# Altium PCB SZG-TEMPLATE-STD.PcbDoc (part 2 of 2)
Units mil, origin at the board's own origin, x right, y up, seen from the top; angles counter-clockwise.
Board outline 1771.65 x 2755.91 mil, 4 copper layers (L1-TOP, L2-GND, L3-3.3V, L4-BOT), stack 60.25 mil thick; 64 components, 79 nets, 292 pads, 121 vias.
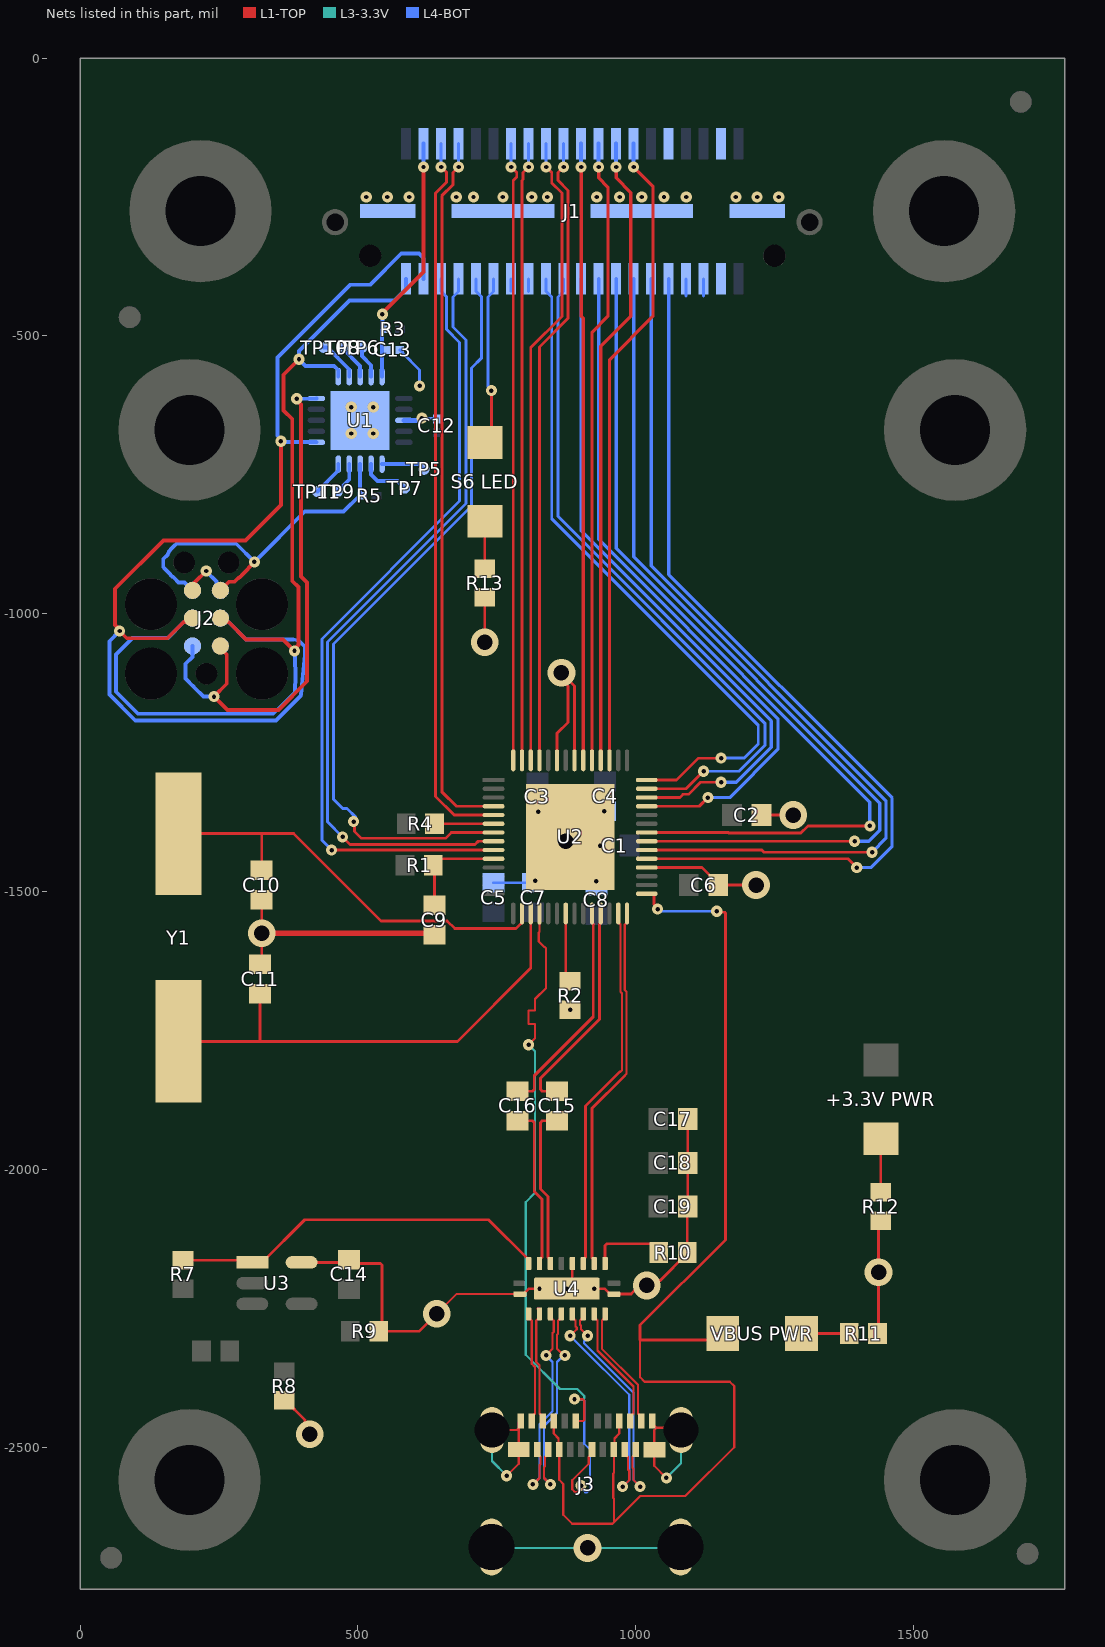
[diagram p4: the nets of this part, all layers, seen from the top]

## Via types
v1: diameter 20, hole 8, L1-TOP to L4-BOT, tented both sides, 57 vias
v2: diameter 20, hole 8, L1-TOP to L4-BOT, 47 vias
v3: diameter 50, hole 28, L1-TOP to L4-BOT, 14 vias
v4: diameter 19.68, hole 7.87, L1-TOP to L4-BOT, 3 vias

## Nets (pads, with @x,y where several pads share a name; then routed paths per layer and width w, separated by ;. In a path a pad name is that pad's centre, name@x,y a point inside that pad or via, vN(x,y) a via of type N, cw(c..) or ccw(c..) an arc to the next point about the centre after c; other vN are vias at no path point) (continued)
DA_P: J3.A6 J3.B6 U2.18 | length 1397.7
  L1-TOP w4: v2(807.09,-1775.59) 818.83,-1763.84 818.83,-1740.16 818.83,-1738.16 806.83,-1738.16 806.83,-1714.16 818.83,-1714.16 818.83,-1700.79 818.83,-1693.48 838.52,-1673.79 838.52,-1602.02 836.18,-1599.68 835.48,-1599.68 825.52,-1589.72 825.52,-1573.57 826.77,-1572.32 U2.18@826.77,-1539.37 ; v2(889.76,-2413.39) 905.07,-2413.39 907.42,-2415.73 907.42,-2429.07 ; J3.A6@891.73,-2452.76 905.07,-2452.76 907.42,-2450.41 907.42,-2429.07 ; v2(901.57,-2569.09) 901.57,-2573.28 894.01,-2580.84 890.7,-2580.84 885.57,-2575.72 885.57,-2559.42 915.42,-2529.58 915.42,-2517.65 921.26,-2511.81 J3.B6@921.26,-2503.94
  L3-3.3V w4: v2(807.09,-1775.59) 818.83,-1787.34 818.83,-2042.02 801.93,-2058.92 801.93,-2333.35 863.66,-2395.08 894.77,-2395.08 907.42,-2407.73 907.42,-2411.04 905.07,-2413.39 v2(889.76,-2413.39)
  L4-BOT w4: v2(889.76,-2413.39) 905.07,-2413.39 907.42,-2415.73 907.42,-2493.48 917.57,-2503.63 917.57,-2575.72 912.45,-2580.84 909.14,-2580.84 901.57,-2573.28 v2(901.57,-2569.09)
DATA_0: J1.31 U2.33 | length 1651.8
  L1-TOP w5: U2.33@1019.69,-1440.94 1381.89,-1440.94 v2(1397.64,-1456.69)
  L4-BOT w6: J1.31@1059.13,-397.24 1059.13,-929.4 1461.26,-1331.53 1461.26,-1418.53 1423.09,-1456.69 v2(1397.64,-1456.69)
DATA_1: J1.29 U2.34 | length 1624.5
  L1-TOP w5: U2.34@1019.69,-1425.2 1226.64,-1425.2 1230.58,-1429.13 v2(1425.2,-1429.13)
  L4-BOT w6: J1.29@1027.63,-397.24 1027.63,-913.45 1450.26,-1336.09 1450.26,-1404.07 v2(1425.2,-1429.13)
DATA_2: J1.27 U2.35 | length 1603.6
  L1-TOP w5: U2.35@1019.69,-1409.45 v2(1393.7,-1409.45)
  L4-BOT w6: J1.27@996.13,-397.24 996.13,-897.7 1439.26,-1340.83 1439.26,-1389.35 1419.16,-1409.45 v2(1393.7,-1409.45)
DATA_3: J1.25 U2.36 | length 1581.1
  L1-TOP w5: U2.36@1019.69,-1393.7 1166.34,-1393.7 1167.35,-1394.7 1296.93,-1394.7 1309.74,-1381.89 v2(1421.26,-1381.89)
  L4-BOT w6: J1.25@964.63,-397.24 964.63,-882.14 1421.26,-1338.77 v2(1421.26,-1381.89)
DATA_4: J1.23 U2.39 | length 1259.2
  L1-TOP w5: U2.39@1019.69,-1346.46 1114.17,-1346.46 v2(1129.92,-1330.71)
  L4-BOT w6: J1.23@933.13,-397.24 933.13,-866.2 1255.91,-1188.98 1255.91,-1244.09 1169.29,-1330.71 v2(1129.92,-1330.71)
DATA_5: J1.21 U2.40 | length 1246.7
  L1-TOP w5: U2.40@1019.69,-1330.71 1079.34,-1330.71 1085.09,-1324.96 1094.69,-1324.96 1116.5,-1303.15 v2(1153.54,-1303.15)
  L4-BOT w6: J1.21@901.63,-397.24 901.63,-850.45 1244.09,-1192.91 1244.09,-1240.16 1181.1,-1303.15 v2(1153.54,-1303.15)
DATA_6: J1.19 U2.41 | length 1243
  L1-TOP w5: U2.41@1019.69,-1314.96 1090.55,-1314.96 v2(1122.05,-1283.46)
  L4-BOT w5.25: J1.19@870.13,-397.24 870.13,-419.87 860,-430 860,-824.57 1232.28,-1196.85 1232.28,-1236.94 1185.76,-1283.46 v2(1122.05,-1283.46)
DATA_7: J1.17 U2.42 | length 1222.9
  L1-TOP w5: U2.42@1019.69,-1299.21 1073.44,-1299.21 1112.81,-1259.84 v2(1153.54,-1259.84)
  L4-BOT w5.25: J1.17@838.63,-397.24 838.63,-419.63 848.75,-429.75 848.75,-829.07 1220.47,-1200.79 1220.47,-1234.26 1194.89,-1259.84 v2(1153.54,-1259.84)
DATA_8: J1.28 U2.45 | length 1156.7
  L1-TOP w6: U2.45@952.76,-1263.78 952.76,-542.81 1031,-464.57 1031,-230.87 v1(996.13,-196)
  L4-BOT w7: v1(996.13,-196) J1.28@996.13,-153.94
DATA_9: J1.26 U2.46 | length 1143.1
  L1-TOP w6: U2.46@937.01,-1263.78 937.01,-518.56 991,-464.57 991,-242 964.63,-215.63 v1(964.63,-196)
  L4-BOT w7: v1(964.63,-196) J1.26@964.63,-153.94
DATA_10: J1.24 U2.47 | length 1128.7
  L1-TOP w6: U2.47@921.26,-1263.78 921.26,-493.31 950,-464.57 950,-232 933.13,-215.13 v1(933.13,-196)
  L4-BOT w7: v1(933.13,-196) J1.24@933.13,-153.94
DATA_11: J1.22 U2.48 | length 1111.5
  L1-TOP w6: v1(901.63,-196) 901.63,-464.57 905.51,-468.45 U2.48@905.51,-1263.78
  L4-BOT w7: v1(901.63,-196) J1.22@901.63,-153.94
DATA_12: J1.20 U2.53 | length 1142.9
  L1-TOP w5.25: U2.53@826.77,-1263.78 826.77,-519.69 878.25,-468.21 878.25,-238.25 860,-220 860,-206.12 v1(870.13,-196)
  L4-BOT w5.25: v1(870.13,-196) J1.20@870.13,-153.94
DATA_13: J1.18 U2.54 | length 1144.8
  L1-TOP w5.25: U2.54@811.02,-1263.78 811.02,-520.94 867,-464.96 867,-242.91 848.75,-224.66 848.75,-206.12 v1(838.63,-196)
  L4-BOT w5.25: v1(838.63,-196) J1.18@838.63,-153.94
DATA_14: J1.16 U2.55 | length 1114.8
  L1-TOP w5.25: U2.55@795.28,-1263.78 795.28,-220.39 797,-218.66 797,-206.12 v1(807.13,-196)
  L4-BOT w5.25: v1(807.13,-196) J1.16@807.13,-153.94
DATA_15: J1.14 U2.56 | length 1116.6
  L1-TOP w5.25: v1(775.63,-196) 785.75,-206.12 785.75,-214 779.53,-220.22 U2.56@779.53,-1263.78
  L4-BOT w5.25: v1(775.63,-196) J1.14@775.63,-153.94
DCBLOCKED_TX_N: C16.1 U4.8 | length 292.4
  L1-TOP w5.25: C16.1@787.4,-1912.4 814.22,-1912.4 817.29,-1915.48 817.29,-2039.62 830.99,-2053.32 830.99,-2158.18 826.77,-2162.4 U4.8@826.77,-2169.29
DCBLOCKED_TX_P: C15.1 U4.7 | length 292.4
  L1-TOP w5.25: U4.7@846.46,-2169.29 846.46,-2162.4 842.24,-2158.18 842.24,-2048.66 828.54,-2034.96 828.54,-1915.48 831.62,-1912.4 C15.1@858.44,-1912.4
GND: C1.1 C2.1 C3.1 C4.1 C5.1 C6.1 C7.1 C8.1 C9.1 C10.1 C11.1 C12.2 C13.1 C14.1 C17.1 C18.2 C19.1 J1.0 J2.6 J3.A1 J3.A12 J3.B1 J3.B12 J3.S R2.1 R8.2 R9.2 R10.1 R11.1 R12.1 R13.1 U1.8 U1.PAD U2.32 U2.49 U2.51 U2.57 U3.5 U4.5 U4.11 U4.20 U4.21 | length 4062.4
  L1-TOP w4: v3(641.73,-2259.84) 677.17,-2224.41 U4.11@791.34,-2224.41 ; J3.S@741.34,-2468.9 785.93,-2468.9 787.46,-2467.38 ; v2(767.72,-2551.18) 789.37,-2529.53 J3.B12@789.37,-2503.94 ; J3.B12@789.37,-2500 789.37,-2469.29 ; 789.4,-2469.26 789.4,-2456.66 J3.A1@793.31,-2452.76 ; J3.A12@1029.53,-2448.82 1029.53,-2456.69 1037.8,-2464.96 ; J3.B1@1033.46,-2504.33 1033.46,-2533.46 v2(1055.12,-2555.12) ; J3.B1@1033.46,-2500.39 1033.46,-2469.29 1037.8,-2464.96 ; J3.S@1081.5,-2464.96 1037.8,-2464.96
  L1-TOP w5: C11.1@323.99,-1630.91 326.77,-1628.12 v3(326.77,-1574.8) C10.1@326.77,-1514.76 ; R8.2@367.32,-2415.35 369.29,-2415.35 404.78,-2450.84 404.78,-2467.77 v3(413.39,-2476.38) ; U3.5@398.63,-2167.32 479.33,-2167.32 C14.1@484.25,-2162.4 491.14,-2169.29 540.38,-2169.29 543.31,-2172.22 543.31,-2285.43 R9.2@537.4,-2291.34 610.24,-2291.34 v3(641.73,-2259.84) ; C9.1@634.67,-1574.8 C9.1@637.8,-1577.92 ; v3(728.35,-1051.18) R13.1@728.35,-970.47 ; U4.11@791.34,-2224.41 798.23,-2224.41 808.07,-2214.57 v4(826.77,-2214.57) ; U2.51@858.27,-1263.78 858.27,-1215.09 877.95,-1195.41 877.95,-1130.29 874.75,-1127.09 874.75,-1121.31 v3@877.95,-1118.11 ; v3(866.14,-1106.3) v3@877.95,-1118.11 ; R2.1@874.02,-1724.41 R2.1@875.98,-1724.41 ; v4(875.98,-2214.57) 885.83,-2204.72 U4.5@885.83,-2169.29 ; U2.49@889.76,-1263.78 889.76,-1129.92 v3@877.95,-1118.11 ; v4(925.2,-2214.57) 943.9,-2214.57 953.74,-2224.41 U4.20@960.63,-2224.41 991.76,-2224.41 1007.51,-2208.66 v3(1019.69,-2208.66) 1028.3,-2200.05 1044.04,-2200.05 1092.52,-2151.57 R10.1@1092.52,-2149.61 1092.52,-2067.91 C19.1@1093.5,-2066.93 C18.2@1093.5,-1988.19 C17.1@1093.5,-1909.45 ; U2.32@1019.69,-1456.69 1119.09,-1456.69 1148.62,-1486.22 C6.1@1148.62,-1488.19 v3(1216.54,-1488.19) ; C2.1@1226.38,-1362.2 v3(1283.46,-1362.2) ; R11.1@1435.04,-2295.28 1437.01,-2293.31 v3(1437.01,-2185.04) 1437.01,-2096.46 R12.1@1440.94,-2092.52
  L1-TOP w7: J2.6@202.36,-957.87 206.95,-953.28 206.95,-943.05 v1(227,-923)
  L1-TOP w10: v3(326.77,-1574.8) C9.1@634.67,-1574.8
  L3-3.3V w4: J3.S@740.55,-2679.53 742.13,-2681.1 v3(913.39,-2681.1) 1079.13,-2681.1 J3.S@1080.71,-2679.53 ; J3.S@741.34,-2468.9 741.34,-2524.8 v2(767.72,-2551.18) ; v2(1055.12,-2555.12) 1081.5,-2528.74 J3.S@1081.5,-2468.9
  L4-BOT w4: v1(615,-648) 640.13,-648 C12.2@641.73,-649.61
  L4-BOT w5: C13.1@575.2,-525.31 576.18,-525.31 580.57,-529.7 580.57,-530.68 611,-561.11 v1(611,-590) ; C5.1@744.09,-1484.25 C7.1@815.13,-1484.25 817.1,-1484.25 865.41,-1435.94 865.41,-1418.06 v3(874.02,-1409.45) ; C3.1@822.83,-1356.3 v2(824.8,-1356.3) 874.02,-1405.51 v3(874.02,-1409.45) ; C8.1@929.13,-1489.34 927.17,-1489.34 911.95,-1474.12 911.95,-1472.16 881.74,-1441.95 881.74,-1417.18 v3(874.02,-1409.45) ; v2(935.63,-1417.32) 927.76,-1409.45 v3(874.02,-1409.45) ; C4.1@944.88,-1355.15 v2(942.91,-1355.15) 897.22,-1400.84 882.63,-1400.84 v3(874.02,-1409.45)
  L4-BOT w7: v1(227,-923) 227,-923.85 245.31,-942.16 245.31,-944.33 252.36,-951.38 J2.6@252.36,-957.87
  L4-BOT w9: U1.8@582.74,-652 611,-652 v1(615,-648)
  other v1: 488,-675.62 527.62,-675.62 488,-628 527.62,-628 515,-250 553,-250 592,-250 677,-250 708,-250 761,-250 812.9,-250 841,-250 929.83,-250 970.83,-250 1010.83,-250 1050.83,-250 1090.83,-250 1180.31,-250 1218.31,-250 1257.31,-250
  other v2: 881.89,-1712.6 929.13,-1481.47 818.9,-1480.31
LED: "S6 LED.1" J1.11 | length 306.3
  L1-TOP w5: 728.35,-691.92 740.16,-680.11 v2(740.16,-598.43)
  L4-BOT w5.25: v2(740.16,-598.43) 734,-592.27 734,-430 744.13,-419.87 J1.11@744.13,-397.24
MCU_MISO: J2.1 U1.20 | length 984.6
  L1-TOP w7: J2.1@252.36,-1057.87 252.36,-1061.47 264,-1073.11 264,-1126 v1(241,-1149) 265.23,-1173.23 356.77,-1173.23 408.56,-1121.44 408.56,-943.99 397.64,-933.07 397.64,-623.6 390,-615.96 v1(390,-613)
  L4-BOT w7: J2.1@202.36,-1057.87 202.36,-1077.64 190,-1090 190,-1117 192.05,-1119.05 201.86,-1128.86 202.81,-1129.92 ccw(c227.36,-1107.87) 205.38,-1132.48 206.37,-1133.38 222,-1149 v1(241,-1149) ; v1(390,-613) 424.89,-613 U1.20@425.26,-612.63
MCU_RESET_B: J2.5 R5.1 U1.13 | length 652.5
  L1-TOP w7: J2.5@252.36,-957.87 267.83,-942.41 278.1,-942.41 284.33,-936.18 ccw(c267.36,-907.87) 291.4,-930.48 v1(313.75,-906.76)
  L4-BOT w7: J2.5@202.36,-957.87 202.06,-957.87 187.66,-943.48 176.91,-943.48 168.48,-935.05 166.52,-933.46 cw(c187.36,-907.87) 161.74,-928.67 160.19,-926.76 151.66,-918.23 149.61,-916.18 149.61,-901.39 157.04,-893.96 cw(c200.14,-913.74) 174.24,-874.02 281.01,-874.02 v1(313.75,-906.76) 404.23,-816.28 474,-816.28 R5.1@503.28,-787 ; R5.1@504,-786.28 U1.13@504,-730.74
MCU_SCL_USCK: J1.1 J2.3 U1.1 | length 1731.5
  L1-TOP w7: J2.3@252.36,-1007.87 258.86,-1007.87 266.25,-1015.27 267.74,-1015.27 298.47,-1046 364.9,-1046 v1(385.83,-1066.93) 385.83,-1063.41 393.05,-1056.19 393.05,-952.1 381.89,-940.94 381.89,-649.61 366.14,-633.86 366.14,-569.86 v1(394,-542)
  L4-BOT w7: J2.3@202.36,-1007.87 195.87,-1007.87 188.83,-1014.92 186.64,-1014.92 158.24,-1043.31 94.49,-1043.31 64.6,-1073.19 64.6,-1140.34 104.24,-1179.98 347.6,-1179.98 384.45,-1143.13 386.5,-1141.08 387.57,-1110.05 ccw(c327.36,-1107.87) 387.55,-1105.16 v1(385.83,-1066.93) ; U1.1@464.63,-573.26 464.63,-561.63 457,-554 406,-554 v1(394,-542) 394,-527 485,-436 566,-436 586.63,-415.37 J1.1@586.63,-397.24
MCU_SDA_MOSI: J1.3 J2.4 U1.16 | length 2070.5
  L1-TOP w7: J2.4@202.36,-1007.87 195.87,-1007.87 188.87,-1014.88 186.59,-1014.88 157.47,-1044 84,-1044 v1(71,-1031) 71,-1028.41 62.99,-1020.4 62.99,-955.01 150,-868 297.35,-868 361.29,-804.06 v1(361.29,-689.48)
  L4-BOT w7: v1(71,-1031) 52.6,-1049.4 52.6,-1145.31 99.27,-1191.98 352.57,-1191.98 396.45,-1148.1 397.5,-1145.64 404.33,-1074.59 404.33,-1059.27 393.49,-1048.43 383.16,-1046 298.3,-1046 267.65,-1015.35 266.33,-1015.35 258.86,-1007.87 J2.4@252.36,-1007.87 ; U1.16@425.26,-691.37 424.89,-691 362.82,-691 362.82,-687.48 355,-679.67 355,-539 486,-408 522,-408 578,-352 610,-352 618.13,-360.13 J1.3@618.13,-397.24
NetD1_2: "VBUS PWR.2" R11.2 | length 85.6
  L1-TOP w5: 1298.22,-2295.28 R11.2@1383.86,-2295.28
NetD2_2: "+3.3V PWR.2" R12.2 | length 96.5
  L1-TOP w5: R12.2@1440.94,-2041.34 1440.94,-1944.88
NetD3_2: "S6 LED.2" R13.2 | length 85.6
  L1-TOP w5: R13.2@728.35,-919.29 728.35,-833.65
NetR2_2: R2.2 U2.21 | length 147
  L1-TOP w5: R2.2@874.02,-1673.23 875.53,-1673.23 R2.2@889.76,-1659 ; U2.21@874.02,-1539.37 874.02,-1653.54 R2.2@881.89,-1661.42
NetR4_1: R4.1 U2.6 | length 106.3
  L1-TOP w5: R4.1@637.8,-1377.95 U2.6@744.09,-1377.95
NetTP5_1: TP5.1 U1.11 | length 79.5
  L4-BOT w7: U1.11@543.37,-730.74 609.74,-730.74 TP5.1@619,-740
NetTP6_1: TP6.1 U1.4 | length 59.2
  L4-BOT w7: TP6.1@507,-521 507,-536 523.69,-552.69 U1.4@523.69,-573.26
NetTP7_1: TP7.1 U1.12 | length 89.3
  L4-BOT w7: U1.12@523.69,-730.74 523.69,-749.69 535,-761 571,-761 TP7.1@584,-774
NetTP8_1: TP8.1 U1.3 | length 65.1
  L4-BOT w7: TP8.1@473,-521 473,-523 504,-554 U1.3@504,-573.26
NetTP9_1: TP9.1 U1.14 | length 58.1
  L4-BOT w7: TP9.1@463,-780 484.31,-758.69 U1.14@484.31,-730.74
NetTP10_1: TP10.1 U1.2 | length 74.5
  L4-BOT w7: TP10.1@439,-521 445,-521 484.31,-560.31 U1.2@484.31,-573.26
NetTP11_1: TP11.1 U1.15 | length 64.8
  L4-BOT w7: TP11.1@427,-780 464.63,-742.37 U1.15@464.63,-730.74
OE: J1.5 U2.9 | length 1443.1
  L1-TOP w5: v2(452.77,-1425.21) U2.9@744.09,-1425.2
  L4-BOT w5.25: v2(452.77,-1425.21) 435.13,-1407.56 435.13,-1045.18 683,-797.31 683,-511.91 659.75,-488.66 659.75,-429.75 649.63,-419.63 J1.5@649.63,-397.24
OEn: R10.2 U4.2 | length 137.6
  L1-TOP w5: U4.2@944.88,-2169.29 944.88,-2136.79 947.81,-2133.86 1027.11,-2133.86 1041.34,-2148.09 R10.2@1041.34,-2149.61
P2C_CLKN: J1.35 | length 31.2
  L4-BOT w5.25: 1122.13,-428.41 J1.35@1122.13,-397.24
P2C_CLKP: J1.33 | length 31.2
  L4-BOT w5.25: 1090.63,-428.41 J1.33@1090.63,-397.24
R_GA: C13.2 J1.4 R3.1 U1.5 | length 450.5
  L1-TOP w7: v1@544,-459 618,-385 v1(618,-196)
  L4-BOT w7: U1.5@543.37,-573.26 543.37,-487.91 544.28,-487 544.28,-459.28 v1@544,-459 ; v1(618,-196) 618.13,-195.87 J1.4@618.13,-153.94
  other v1: 544,-461
RD: J1.7 U2.8 | length 1412.2
  L1-TOP w5: v2(472.44,-1401.57) 486.07,-1415.2 710.78,-1415.2 716.54,-1409.45 U2.8@744.09,-1409.45
  L4-BOT w5: v2(472.44,-1401.57) 445.26,-1374.39 445.26,-1050.81 694.25,-801.81 694.25,-539.37
  L4-BOT w5.25: J1.7@681.13,-397.24 681.13,-419.87 671,-430 671,-484 694.25,-507.25 694.25,-539.37
"Reset Pullup": C9.2 R1.1 U2.10 | length 186
  L1-TOP w5: C9.2@637.8,-1524.77 637.8,-1454.72 R1.1@635.83,-1452.76 647.64,-1440.94 U2.10@744.09,-1440.94
RSVD_37: J1.37
RSVD_38: J1.38
RX1_N: J3.B10 U4.15 | length 411.1
  L1-TOP w4: J3.B10@842.52,-2503.94 842.52,-2511.81 836.68,-2517.65 836.68,-2533.76 834.71,-2535.73 834.71,-2555.18 v2(846.46,-2566.93) ; U4.15@866.14,-2259.84 866.14,-2266.73 863.22,-2269.65 862.64,-2269.65 860.3,-2272 860.3,-2295.57 858.33,-2297.54 858.33,-2322.9 870.08,-2334.65 v2(872.58,-2334.65)
  L4-BOT w4: v2(846.46,-2566.93) 834.71,-2555.18 834.71,-2461.91 858.33,-2438.29 858.33,-2346.39 870.08,-2334.65 v2(872.58,-2334.65)
RX1_P: J3.B11 U4.14 | length 406.1
  L1-TOP w4: v2(814.96,-2566.93) 826.71,-2555.18 826.71,-2532.42 828.68,-2530.45 828.68,-2517.65 822.83,-2511.81 J3.B11@822.83,-2503.94 ; v2(838.58,-2334.65) 850.33,-2322.9 850.33,-2294.23 852.3,-2292.26 852.3,-2272 849.96,-2269.65 849.38,-2269.65 846.46,-2266.73 U4.14@846.46,-2259.84
  L4-BOT w4: v2(814.96,-2566.93) 826.71,-2555.18 826.71,-2458.6 850.33,-2434.98 850.33,-2346.39 v2(838.58,-2334.65)
RX2_N: J3.A10 U4.18 | length 225
  L1-TOP w4: U4.18@925.2,-2259.84 925.2,-2266.73 928.12,-2269.65 928.7,-2269.65 931.04,-2272 931.04,-2325.87 996,-2390.83 996,-2439.04 990.16,-2444.88 J3.A10@990.16,-2452.76
RX2_P: J3.A11 U4.19 | length 225
  L1-TOP w4: U4.19@944.88,-2259.84 944.88,-2266.73 941.96,-2269.65 941.38,-2269.65 939.04,-2272 939.04,-2322.55 1004,-2387.51 1004,-2439.04 1009.84,-2444.88 J3.A11@1009.84,-2452.76
RX_N: U2.27 U4.4 | length 662.5
  L1-TOP w4: U2.27@968.5,-1539.37 968.5,-1555.52 972.38,-1559.4 972.38,-1680.37 975.39,-1683.38 975.39,-1821.53 972.14,-1824.78 970.75,-1824.78
  L1-TOP w5.25: U4.4@905.51,-2169.29 905.51,-2162.4 909.73,-2158.18 909.73,-1885.81 970.75,-1824.78
RX_P: U2.28 U4.3 | length 660.4
  L1-TOP w4: 978.71,-1832.74 983.39,-1828.05 983.39,-1680.07 980.38,-1677.05 980.38,-1559.4 984.25,-1555.52 U2.28@984.25,-1539.37
  L1-TOP w5.25: U4.3@925.2,-2169.29 925.2,-2162.4 920.98,-2158.18 920.98,-1890.47 978.71,-1832.74
RXF: J1.6 U2.5 | length 1305.5
  L1-TOP w5.25: v1(649.63,-196) 659.75,-206.12 659.75,-223.25 639.75,-243.25 639.75,-1328.73 673.23,-1362.2 U2.5@744.09,-1362.2
  L4-BOT w5.25: v1(649.63,-196) J1.6@649.63,-153.94
S8: J1.13 | length 22.4
  L4-BOT w5.25: J1.13@775.63,-419.63 J1.13@775.63,-397.24
S10: J1.15 | length 22.6
  L4-BOT w5.25: J1.15@807.13,-419.87 J1.15@807.13,-397.24
S27: J1.32
SEL: R7.1 U3.1 U4.9 | length 692.1
  L1-TOP w5: R7.1@185.04,-2163.39 306.09,-2163.39 U3.1@310.03,-2167.32 327.47,-2167.32 404.24,-2090.55 735.24,-2090.55 807.09,-2162.4 U4.9@807.09,-2169.29
TX1_N: J3.A3 U4.13 | length 210.9
  L1-TOP w4: U4.13@826.77,-2259.84 826.77,-2266.73 823.85,-2269.65 823.27,-2269.65 820.93,-2272 820.93,-2346.46 826.83,-2352.37 826.83,-2439.04 832.68,-2444.88 J3.A3@832.68,-2452.76
  L1-TOP w5.25: U4.13@824.26,-2250.66 824.48,-2250.66 826.77,-2252.95 U4.13@826.77,-2259.84
TX1_P: J3.A2 U4.12 | length 200.5
  L1-TOP w4: U4.12@807.09,-2259.84 807.09,-2266.73 810.01,-2269.65 810.59,-2269.65 812.93,-2272 812.93,-2349.78 818.83,-2355.68 818.83,-2439.04 812.99,-2444.88 J3.A2@812.99,-2452.76
TX2_N: J3.B3 U4.16 | length 444.5
  L1-TOP w4: v2(881.89,-2299.21) 882.25,-2299.21 893.64,-2287.83 893.64,-2284.51 891.67,-2282.54 891.67,-2272 889.33,-2269.65 888.75,-2269.65 885.83,-2266.73 U4.16@885.83,-2259.84 ; v2(976.38,-2570.87) 988.13,-2559.12 988.13,-2542.39 986.16,-2540.42 986.16,-2517.65 980.32,-2511.81 J3.B3@980.32,-2503.94
  L1-TOP w5.25: U4.16@885.17,-2260.5 U4.16@885.83,-2259.84
  L4-BOT w4: v2(881.89,-2299.21) 898.86,-2316.18 988.13,-2405.45 988.13,-2559.12 v2(976.38,-2570.87)
TX2_P: J3.B2 U4.17 | length 439.3
  L1-TOP w4: U4.17@905.51,-2259.84 905.51,-2266.73 902.59,-2269.65 902.01,-2269.65 899.67,-2272 899.67,-2279.23 901.64,-2281.2 901.64,-2287.83 913.03,-2299.21 v2(913.39,-2299.21) ; J3.B2@1000,-2503.94 1000,-2511.81 994.16,-2517.65 994.16,-2537.1 996.13,-2539.07 996.13,-2559.12 v2(1007.87,-2570.87)
  L4-BOT w4: v2(913.39,-2299.21) 913.39,-2303.03 906.86,-2309.56 906.86,-2312.87 996.13,-2402.14 996.13,-2559.12 v2(1007.87,-2570.87)
TX_N: C16.2 U2.24 | length 392.9
  L1-TOP w5.25: C16.2@787.4,-1859.25 814.22,-1859.25 817.29,-1856.18 817.29,-1831.29 923.51,-1725.07 923.51,-1558.08 921.26,-1555.83 U2.24@921.26,-1539.37
TX_P: C15.2 U2.25 | length 392.9
  L1-TOP w5.25: C15.2@858.44,-1859.25 831.62,-1859.25 828.54,-1856.18 828.54,-1835.95 934.76,-1729.73 934.76,-1558.08 937.01,-1555.83 U2.25@937.01,-1539.37
TXE: J1.8 U2.4 | length 1282.8
  L1-TOP w5.25: v1(681.13,-196) 671,-206.12 671,-227.91 651,-247.91 651,-1320.29 677.17,-1346.46 U2.4@744.09,-1346.46
  L4-BOT w5.25: v1(681.13,-196) J1.8@681.13,-153.94
VBUS: "VBUS PWR.1" J3.A4 J3.A9 J3.B4 J3.B9 U2.29 | length 2242.1
  L1-TOP w4: J3.A4@852.36,-2452.76 852.36,-2475.38 861.14,-2484.16 861.14,-2502.87 J3.B9@862.2,-2503.94 862.2,-2558.64 869.57,-2566.01 869.57,-2621.54 885.83,-2637.8 958.29,-2637.8 960.63,-2635.45 ; J3.A9@970.47,-2452.76 970.47,-2475.38 961.69,-2484.16 961.69,-2502.87 J3.B4@960.63,-2503.94 960.63,-2546.19 959.38,-2547.44 959.38,-2590.82 960.63,-2592.07 960.63,-2635.45 ; 1007.87,-2307.09 1007.87,-2374.02 1015.75,-2381.89 1169.29,-2381.89 1177.17,-2389.76 1177.17,-2500 1089.3,-2587.87 1008.22,-2587.87 960.63,-2635.45
  L1-TOP w5: U2.29@1019.69,-1503.94 1031.61,-1503.94 1032.93,-1505.26 1032.93,-1522.62 1039.37,-1529.06 v1(1039.37,-1531.5) ; v1(1145.67,-1535.43) 1147.35,-1537.11 1160.17,-1537.11 1161.42,-1538.36 1161.42,-2126.75 1007.87,-2280.29 1007.87,-2307.09 1144.67,-2307.09 1156.49,-2295.28
  L4-BOT w5: v1(1039.37,-1531.5) 1039.37,-1532.5 1042.3,-1535.43 v1(1145.67,-1535.43)
WR: J1.9 U2.7 | length 1392.3
  L1-TOP w5: v2(492.13,-1374.02) 493.88,-1375.77 493.88,-1391.52 506.52,-1404.15 657.63,-1404.15 668.09,-1393.7 U2.7@744.09,-1393.7
  L4-BOT w5.25: v2(492.13,-1374.02) 492.13,-1370.08 496.06,-1366.14 480.52,-1350.59 472.64,-1350.59 455.98,-1333.93 455.98,-1054.4 704.38,-806.01 704.38,-557.75 722.75,-539.37 722.75,-429.75 712.63,-419.63 J1.9@712.63,-397.24
XI: C10.2 U2.16 Y1.1 | length 775.6
  L1-TOP w5: Y1.1@177.17,-1395.67 326.77,-1395.67 ; C10.2@326.77,-1461.61 326.77,-1395.67 ; U2.16@795.28,-1539.37 795.28,-1555.54 784.26,-1566.56 674.44,-1566.56 660.59,-1552.71 541.38,-1552.71 384.35,-1395.67 326.77,-1395.67
XO: C11.2 U2.17 Y1.2 | length 873
  L1-TOP w5: Y1.2@177.17,-1769.69 322.83,-1769.69 ; C11.2@323.99,-1684.06 323.99,-1768.53 322.83,-1769.69 ; U2.17@811.02,-1539.37 811.02,-1637.8 679.13,-1769.69 322.83,-1769.69
pads on no net: FID1.FID? FID2.FID? FID3.FID? FID4.FID? FID5.FID? FID6.FID? FID7.FID? FID8.FID? J1.MH J2.A J2.B J2.C J2.D J2.E J2.F J2.G J3.A8 J3.B8 MH1.1 MH2.1 MH3.1 MH4.1 MH5.1 MH6.1 U1.6 U1.7 U1.10 U1.17 U1.18 U1.19 U2.11 U2.12 U2.13 U2.14 U4.1 U4.10

## Polygon pours and split planes (outlines as drawn)
GND on L3-3.3V "L3_GND" (solid, pour order 22): 21,-2735 21,-21 1751,-21 1751,-2735
+3.3V on L3-3.3V "L3_+3.3V" (solid, pour order 20): 367,-340 367,-494 283.46,-577.54 283.46,-938 478,-938 650,-766 650,-523 633,-506 633,-340
GND on L2-GND (split plane): 1751.56,-2735.81 20.1,-2735.81 20.1,-20.1 1751.56,-20.1

## Other copper
L4-BOT:
  region net +3.3V: 1223.75,-115.13 1176.75,-115.13 1176.75,-192.13 1223.75,-192.13
  rectangle net GND: 501,-291 1271,-239
  region net +3.3V: 1223.75,-358.44 1176.75,-358.44 1176.75,-435.44 1223.75,-435.44
  rectangle net +5V: 548,-192.74 595,-115.74

## Silkscreen, mask and mechanical layers (free items; w line width, h text height)
Top Overlay:
  text "SZG-FT60X-USBC-STD / Rev 01-A" at 629.92,-389.76 h30
  text "|======================||======================| / | SZG Port | FT60X PIN || SZG Port | FT60X PIN | / |======================||======================| / | S0_D0p   | OE        || S1_D1p   | RXF       | / | S2_D0n   | RD        || S3_D1n   | TXE       | / | S4_D2p   | WR        || S4_D3p   | BE 1      | / | S6_D2n   | LED       || S7_D3n   | BE 0      | / | S8_D4p   | NC        || S9_D5p   | DATA 15   | / | S10 D4n  | NC        || S11 D5n  | DATA 14   | / | S12_D6p  | DATA 7    || S13_D7p  | DATA 13   | / | S14_D6n  | DATA 6    || S15_D7n  | DATA 12   | / | S16      | DATA 5    || S17      | DATA 11   | / | S18      | DATA 4    || S19      | DATA 10   | / | S20      | DATA 3    || S21      | DATA 9    | / | S22      | DATA 2    || S23      | DATA 8    | / | S24      | DATA 1    || S25      | CLK       | / | S26      | DATA 0    || S27      | NC        | / |======================||======================|" at 818.9,-1064.58 h30
Outline:
  the board outline again, w10
Mechanical:
  lines w7.87: 0,-472.44 1771.65,-472.44
  text "Carrier board edge" at 452.76,-551.18 h50
Fab Notes:
  text ":::" at 846,28 h50
  text ":::" at -48,-1325 h50 r90
  text ":::" at 1840,-1337 h50 r90
  text ":::" at 840,-2826 h50
  text "ALL UNITS IN MILLIMETERS UNLESS OTHERWISE SPECIFIED" at -461,-3405.74 h50
Doc-Assy-Top:
  lines w2.23: -1668.15,-2438.56 -1578.92,-2438.56 ; -1668.15,-1490.4 -1578.92,-1490.4 ; -1668.15,-542.24 -1578.92,-542.24 ; -530.36,-3297.48 -530.36,-3208.25 ; -530.36,227.44 -530.36,316.68 ; 696.67,-3297.48 696.67,-3208.25 ; 696.67,227.44 696.67,316.68 ; 913.2,-3751.55 913.2,-315.87 ; 913.2,-2033.71 1002.44,-2033.71 ; 1053.62,-3297.48 3061.49,-3297.48 -1668.15,-3297.48 -1668.15,316.68 3061.49,316.68 ; 1635.31,-3208.12 1635.31,-2890.09 2971.88,-2890.09 ; 1635.31,-3100.8 2971.88,-3100.8 ; 1837.01,-3208.12 1837.01,-3100.8 ; 1923.7,-3297.48 1923.7,-3208.25 ; 1923.7,227.44 1923.7,316.68 ; 1970.94,-3391.97 1970.94,222.19 ; 2149.94,-3208.12 2149.94,-3100.8 ; 2212.51,-3100.67 2212.51,-2890.09 ; 2612.54,-3208.12 2612.54,-3100.8 ; 2972.25,-3208.25 -1578.92,-3208.25 -1578.92,227.44 2972.25,227.44 ; 2972.25,-2438.56 3061.49,-2438.56 ; 2972.25,-542.24 3061.49,-542.24
  text "1" at -1154.44,257.85 h31.23
  text "2" at 72.89,257.85 h31.23
  text "3" at 1297.69,257.85 h31.23
  text "4" at 2525.17,257.85 h31.23
  text "A" at -1636.1,-108.54 h31.23
  text "A" at 3007.12,-108.54 h31.23
  text "B" at -1636.1,-1056.7 h31.23
  text "B" at 1916.57,-1151.19 h31.23
  text "C" at -1636.1,-2004.86 h31.23
  text "C" at 3007.12,-2004.86 h31.23
  text "TITLE:" at 1669.95,-2925.21 h20.07
  text "Opal Kelly" at 2247.63,-2939.26 h31.22
  text "D" at -1636.1,-2950.79 h31.23
  text "D" at 3007.12,-2950.79 h31.23
  text "13500 SW 72nd Ave Suite 100" at 2247.63,-2991.93 h31.22
  text "Portland, OR 97223" at 2247.63,-3035.83 h31.22
  text "SZG-TEMPLATE-STD" at 1684.38,-3036.58 h31.22
  text "www.opalkelly.com" at 2247.63,-3079.73 h31.22
  text "(Top)" at 1684.38,-3087.43 h31.22
  text "REV:" at 1660.14,-3130.54 h20.07
  text "SIZE:" at 1864.22,-3130.54 h20.07
  text "ENGINEER:" at 2177.16,-3130.54 h20.07
  text "DATE:" at 2639.75,-3130.54 h20.07
  text "A" at 1687.35,-3184.96 h31.22
  text "ANSI A" at 1891.43,-3184.96 h31.22
  text "RCA" at 2204.37,-3184.96 h31.22
  text ".PRINT_DATE" at 2666.96,-3184.96 h31.22
  text "1" at -1154.44,-3269.89 h31.23
  text "2" at 72.89,-3269.89 h31.23
  text "3" at 1297.69,-3269.89 h31.23
  text "4" at 2525.17,-3269.89 h31.23
Doc-Assy-Bot:
  lines w2.23: -1668.62,-2438.66 -1579.37,-2438.66 ; -1668.62,-1490.4 -1579.37,-1490.4 ; -1668.62,-542.15 -1579.37,-542.15 ; -1579,-3100.96 -242.29,-3100.96 ; -1579,-2890.23 -242.29,-2890.23 -242.29,-3208.3 ; -1219.62,-3208.3 -1219.62,-3100.96 ; -819.55,-3100.83 -819.55,-2890.23 ; -756.98,-3208.3 -756.98,-3100.96 ; -530.71,-3297.66 -530.71,-3208.42 ; -530.71,227.61 -530.71,316.86 ; -444.02,-3208.3 -444.02,-3100.96 ; 339.45,-3297.66 -1668.62,-3297.66 ; 696.44,-3297.66 696.44,-3208.42 ; 696.44,227.61 696.44,316.86 ; 913.2,-3751.72 913.2,-315.69 ; 913.2,-2033.71 1002.45,-2033.71 ; 1923.59,-3297.66 1923.59,-3208.42 ; 1923.59,227.61 1923.59,316.86 ; 1970.95,-3392.15 1970.95,222.37 ; 2972.25,-3208.42 -1579.37,-3208.42 -1579.37,227.61 2972.25,227.61 ; 2972.25,-2438.66 3061.5,-2438.66 ; 2972.25,-542.15 3061.5,-542.15 ; 3061.5,-3297.66 -1668.62,-3297.66 ; 3061.5,316.86 -1668.62,316.86 -1668.62,-3297.66
  text "4" at -1132.24,258.02 h31.24
  text "3" at 95.36,258.02 h31.24
  text "2" at 1320.28,258.02 h31.24
  text "1" at 2547.73,258.02 h31.24
  text "A" at -1614.24,-108.4 h31.24
  text "A" at 3029.44,-108.4 h31.24
  text "B" at -1614.24,-1056.66 h31.24
  text "B" at 1938.89,-1151.15 h31.24
  text "C" at -1614.24,-2004.91 h31.24
  text "C" at 3029.44,-2004.91 h31.24
  text "TITLE:" at -276.93,-2925.35 h20.07
  text "Opal Kelly" at -854.67,-2939.4 h31.22
  text "D" at -1614.24,-2950.94 h31.24
  text "D" at 3029.44,-2950.94 h31.24
  text "13500 SW 72nd Ave Suite 100" at -854.67,-2992.08 h31.22
  text "Portland, OR 97223" at -854.67,-3035.99 h31.22
  text "SZG-TEMPLATE-STD" at -291.37,-3036.74 h31.22
  text "www.opalkelly.com" at -854.67,-3079.89 h31.22
  text "(Bottom)" at -291.37,-3087.59 h31.22
  text "DATE:" at -1246.84,-3130.7 h20.07
  text "ENGINEER:" at -784.19,-3130.7 h20.07
  text "SIZE:" at -471.23,-3130.7 h20.07
  text "REV:" at -267.12,-3130.7 h20.07
  text ".PRINT_DATE" at -1274.05,-3185.13 h31.22
  text "RCA" at -811.41,-3185.13 h31.22
  text "ANSI A" at -498.44,-3185.13 h31.22
  text "A" at -294.34,-3185.13 h31.22
  text "4" at -1132.24,-3270.06 h31.24
  text "3" at 95.36,-3270.06 h31.24
  text "2" at 1320.28,-3270.06 h31.24
  text "1" at 2547.73,-3270.06 h31.24

## Dimensions
0,0 to 0,-2755.91 on Dimensions
0,0 to 1771.65,0 on Dimensions
0,-2755.91 to 196.85,-2559.06 on MTG Locations
0,-2755.91 to 196.85,-2559.06 on MTG Locations
0,0 to 196.85,-669.29 on MTG Locations
0,-2755.91 to 1574.8,-2559.06 on MTG Locations
0,0 to 216.54,-275.59 on MTG Locations
216.54,-275.59 to 1555.12,-275.59 on MTG Locations
0,0 to 216.54,-275.59 on MTG Locations